# Altium PCB PFCv04.03.PcbDoc
Units mm, origin at the board's own origin, x right, y up, seen from the top; angles counter-clockwise.
Board outline 76.71 x 30.99 mm, 4 copper layers (Top Layer, Internal Plane 1, Internal Plane 2, Bottom Layer); 95 components, 75 nets, 406 pads, 194 vias.
Unrouted connection lines stored in the file: 10.
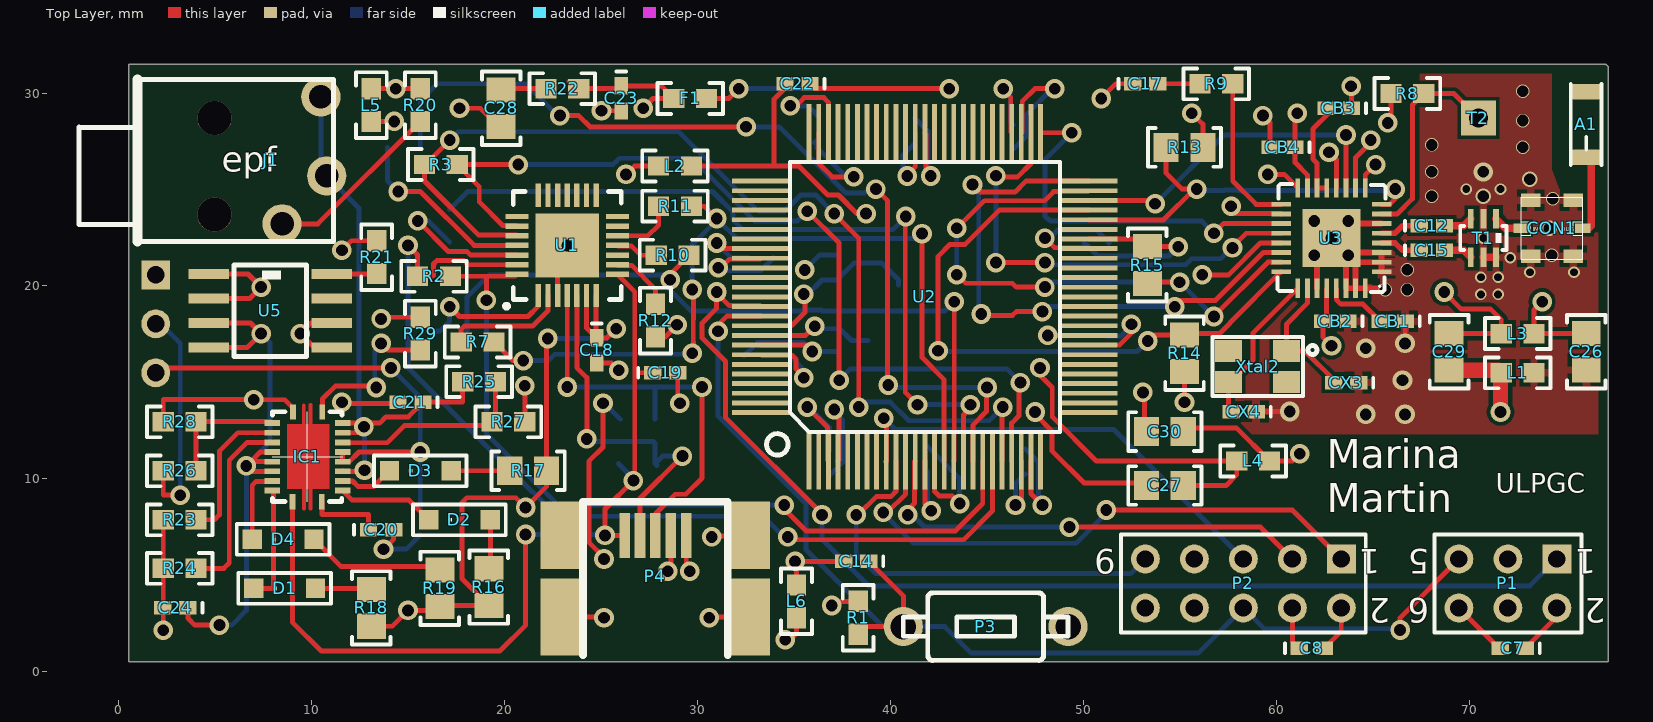
[diagram p0: Top Layer view]
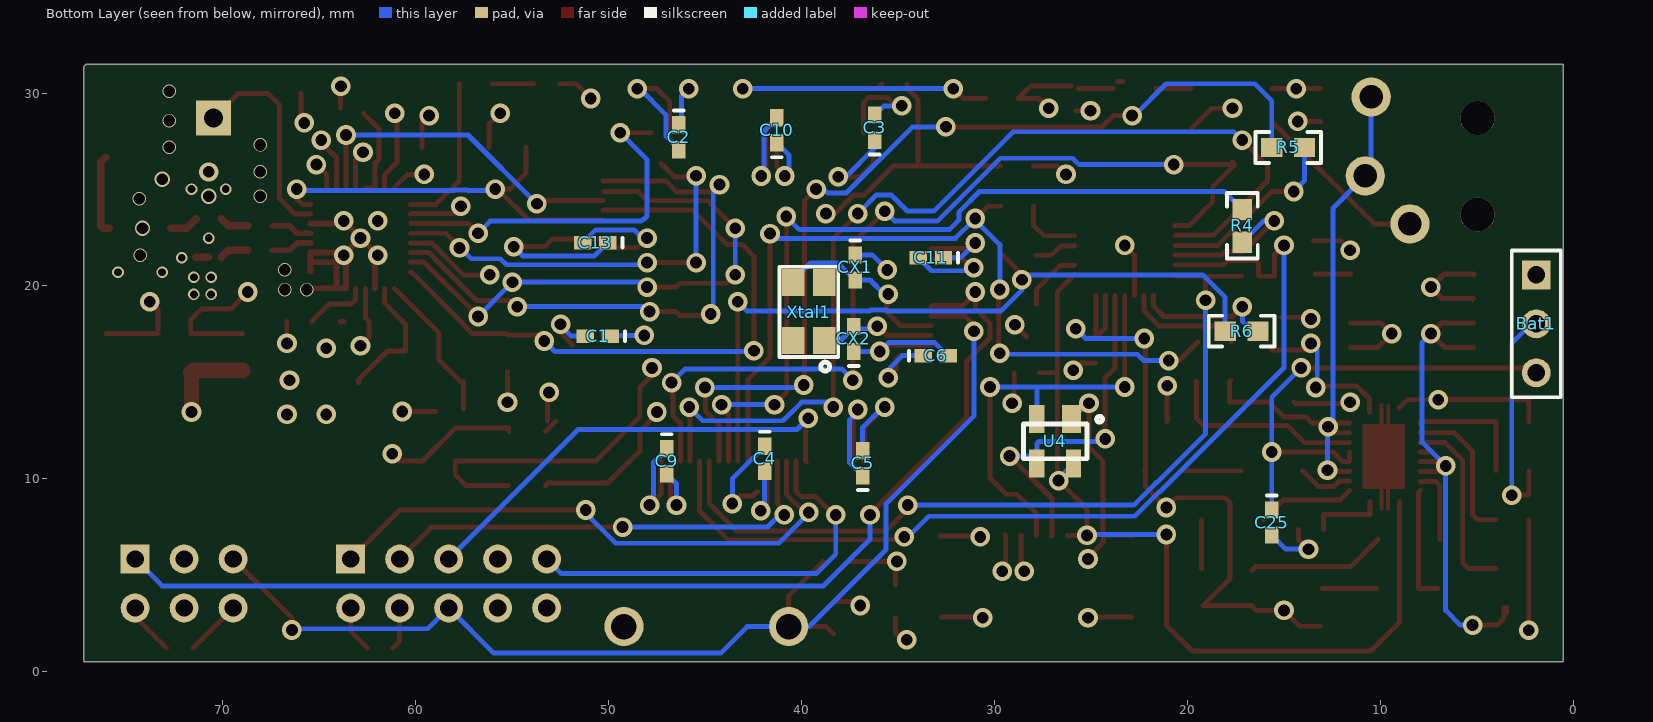
[diagram p1: Bottom Layer view, seen from below]
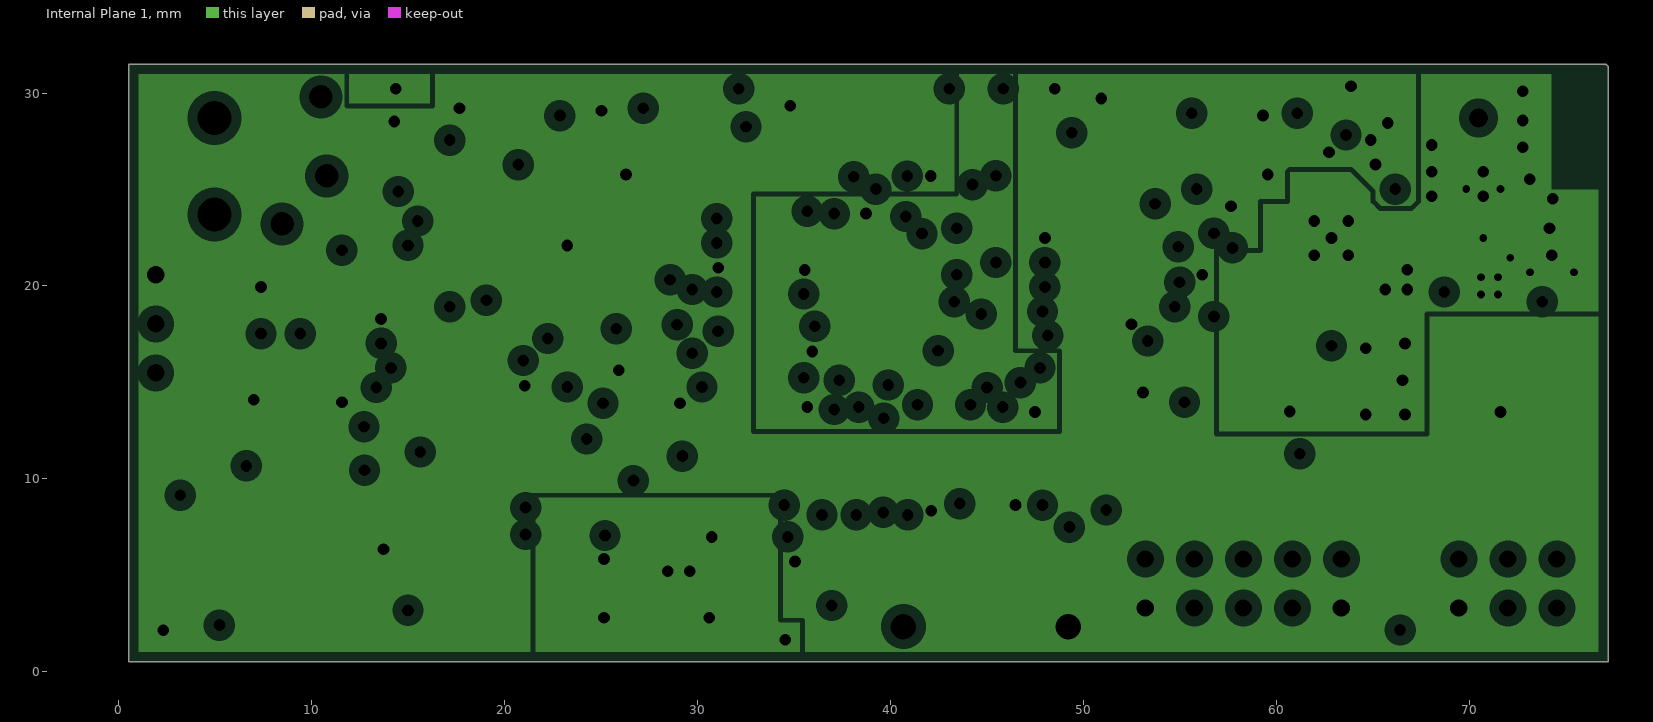
[diagram p2: Internal Plane 1, clearances drawn from the general rule]
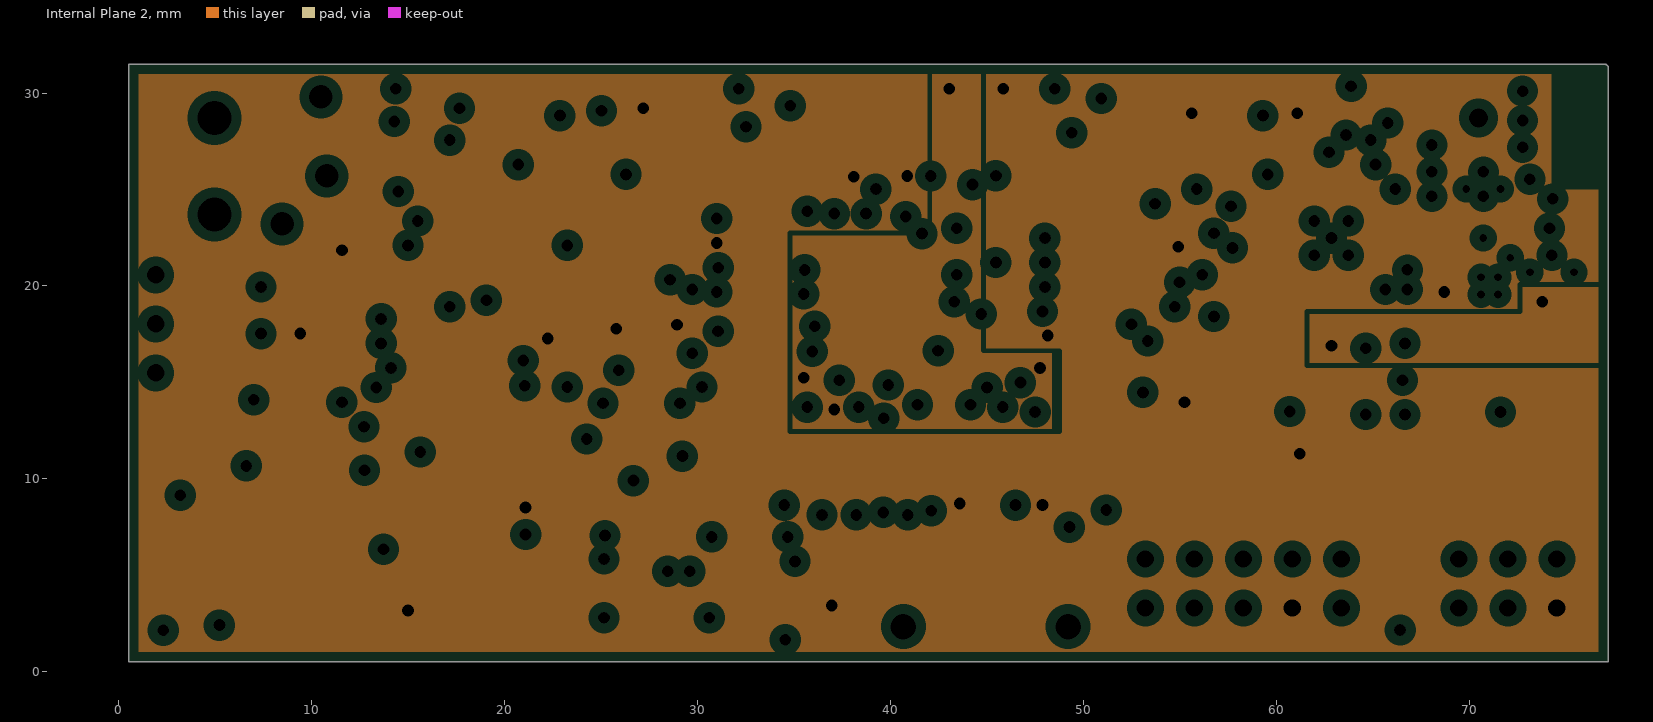
[diagram p3: Internal Plane 2, clearances drawn from the general rule]

## Layer stack, top to bottom
Top Layer: signal copper 0.0356
Dielectric: core 0.32, FR-4, Dk 4.8
Internal Plane 1: plane copper 0.0356, net (Multiple Nets)
Dielectric: prepreg 0.32, FR-4, Dk 4.8
Internal Plane 2: plane copper 0.0356, net (Multiple Nets)
Dielectric: core 0.32, FR-4, Dk 4.8
Bottom Layer: signal copper 0.0356

## Board outline
0.508,0.508 0.508,31.496 77.089,31.496 77.216,31.369 77.216,0.508 0.508,0.508

## Design rules (kind name [scope] priority, off if disabled: settings)
Clearance [All] p1: gap=0.2
ComponentClearance [All] p1: gap=0.15 collisioncheckmode=3 verticalgap=0.2 showdistances=TRUE
FabricationTestPointUsage TestPointUsage [All] p1: valid=0 allowmultiple=FALSE
FabricationTestpoint Testpoint [All] p1: side=3 testpointundercomponent=TRUE minsize=1.016 maxsize=2.54 preferedsize=1.524 minholesize=0 maxholesize=1.016 preferedholesize=0.813 testpointgrid=0.025 allowsidetop=TRUE allowsidebottom=TRUE usegrid=TRUE gridtolerance=0
MinimumSolderMaskSliver [All] p1 off: minsoldermaskwidth=0.1
PlaneClearance [All] p1: clearance=0.508
PlaneConnect [All] p1: planeconnectstyle=Direct reliefexpansion=0.508 reliefentries=4 reliefconductorwidth=0.254 reliefairgap=0.254
PolygonConnect PolygonConnect_2 [(IsVia AND InNet('RF-GND'))] p1: connectstyle=Direct reliefconductorwidth=0.254 reliefentries=4 polygonreliefangle="90 Angle"
PolygonConnect PolygonConnect_1 [All vs IsNamedPolygon('RFGND')] p2: connectstyle=Relief reliefconductorwidth=0.4 reliefentries=4 polygonreliefangle="90 Angle"
PolygonConnect [All] p3: connectstyle=Relief reliefconductorwidth=0.3 reliefentries=4 polygonreliefangle="90 Angle"
RoutingVias [All] p1: holewidth=0.4 width=0.9 viastyle="Through Hole" minholewidth=0.3 minwidth=0.3 maxholewidth=10 maxwidth=10
SilkToSilkClearance [All] p1 off: silktosilkclearance=0.2
SilkscreenOverComponentPads [All] p1 off: minsilkscreentomaskgap=0
SolderMaskExpansion [All] p1: expansion=0.102
Width [All] p1: maxlimit=10 minlimit=0.2 preferedwidth=0.2
20 further rules are at their usual default settings.

## Components (designator, comment, footprint, x,y, rotation, side; value= is the part's Value field where it differs from the comment)
A1 "Ant. 2.45G" "ANTENNA CHIP" 76.073,26.67 r90 top
Bat1 "Batttery" HDR1X3 1.905,20.574 r270 bottom
C1 "C" 0402 50.561,17.399 r0 bottom
C2 "C" 0402 46.355,27.701 r270 bottom
C3 "C" 0402 36.195,28.209 r90 bottom
C4 "C" 0402 41.91,11.034 r270 bottom
C5 "C" 0402 36.83,10.81 r90 bottom
C6 "C" 0402 33.035,16.383 r180 bottom
C7 "C" 0402 72.263,1.219 r180 top
C8 "C" 0402 61.849,1.219 r0 top
C9 "C" 0402 46.99,10.907 r270 bottom
C10 "C" 0402 41.275,28.067 r90 bottom
C11 "C" 0402 33.289,21.463 r0 bottom
C12 "22pF_0402" 0402 68.072,23.114 r0 top
C13 "C" 0402 50.688,22.225 r0 bottom
C14 "C" 0402 38.227,5.715 r180 top
C15 "22pF_0402" 0402 68.072,21.844 r0 top (schematic designator C12)
C17 "C" 0402 53.213,30.48 r0 top
C18 "C" 0402 24.765,16.652 r270 top
C19 "C" 0402 28.321,15.494 r0 top
C20 "C" 0402 13.589,7.366 r0 top
C21 "C" 0402 15.113,13.97 r180 top
C22 "C" 0402 35.179,30.48 r180 top
C23 "C" 0402 26.035,29.718 r270 top
C24 "C" 0402 2.921,3.302 r180 top
C25 "C" 0402 15.621,7.732 r270 bottom
C26 "100nF_0805" 0805 76.073,16.586 r90 top
C27 "100nF_0805" 0805 54.229,9.652 r0 top
C28 "10uF" 0805 19.812,29.21 r90 top
C29 "100nF_0805" 0805 68.961,16.586 r90 top
C30 "100nF_0805" 0805 54.229,12.446 r0 top
CB1 "C" 0402 66.04,18.161 r180 top
CB2 "C" 0402 63.068,18.161 r180 top
CB3 "C" 0402 63.246,29.21 r180 top
CB4 "C" 0402 60.325,27.178 r180 top
CON1 "Conector Antena" "MM8430-2600_COAXIAL CONNECTORS" 74.295,22.987 r0 top
CX1 "C" 0402 37.211,20.955 r270 bottom
CX2 "C" 0402 37.287,17.247 r90 bottom
CX3 "C" 0402 63.627,14.986 r180 top
CX4 "C" 0402 58.318,13.487 r180 top
D1 "Diodo Led" "DIODE LED" 8.585,4.318 r180 top
D2 "Diodo Led" "DIODE LED" 17.653,7.874 r180 top
D3 "Diodo Led" "DIODE LED" 15.621,10.414 r180 top
D4 "Diodo Led" "DIODE LED" 8.509,6.858 r180 top
F1 "Ferrita" 0603 29.616,29.718 r0 top
IC1 "BQ24031" BQ24031 9.587,8.442 r90 top
J1 "CAMSHOT" MJ-2509N 0.965,25.705 r270 top
L1 "22nH_0603" 0603 72.517,15.494 r180 top
L2 "22nH_0603" 0603 28.829,26.213 r180 top
L3 "22nH_0603" 0603 72.517,17.526 r0 top
L4 "22nH_0603" 0603 58.801,10.922 r180 top
L5 "22nH_0603" 0603 13.081,29.376 r270 top
L6 "22nH_0603" 0603 35.128,3.644 r90 top
P1 "Programador" HDR2X3 74.549,5.842 r180 top
P2 "Programador" HDR2X5 63.373,5.842 r180 top
P3 "Pulsador" PUSH-BUTTON-W 40.665,2.337 r0 top
P4 "USB-AB" USB-MINI-AB-SMT 27.813,7.061 r90 top
R1 "R 0402" 0603 38.329,2.794 r90 top
R2 "R 0402" 0603 16.332,20.498 r180 top
R3 "R 0402" 0603 16.688,26.289 r180 top
R4 "R 0402" 0603 17.145,23.114 r90 bottom
R5 "R 0402" 0603 14.771,27.178 r0 bottom
R6 "R 0402" 0603 17.184,17.653 r0 bottom
R7 "R 0402" 0603 18.593,17.094 r0 top
R8 "R 0402" 0603 66.802,29.972 r180 top
R9 "R 0402" 0603 56.896,30.48 r180 top
R10 "R 0402" 0603 28.702,21.59 r180 top
R11 "R 0402" 0603 28.829,24.13 r180 top
R12 "R 0402" 0603 27.813,18.2 r90 top
R13 "16.9kohm-0805" 0805 55.245,27.178 r0 top
R14 "16.9kohm-0805" 0805 55.245,16.51 r270 top
R15 "16.9kohm-0805" 0805 53.315,21.082 r90 top
R16 "16.9kohm-0805" 0805 19.177,4.384 r270 top
R17 "16.9kohm-0805" 0805 21.209,10.414 r0 top
R18 "16.9kohm-0805" 0805 13.081,3.302 r270 top
R19 "16.9kohm-0805" 0805 16.637,4.318 r270 top
R20 "R 0402" 0603 15.621,29.376 r90 top
R21 "R 0402" 0603 13.36,21.488 r90 top
R22 "R 0402" 0603 22.987,30.226 r0 top
R23 "R 0402" 0603 3.144,7.874 r180 top
R24 "R 0402" 0603 3.144,5.357 r180 top
R25 "R 0402" 0603 18.669,15.037 r180 top
R26 "R 0402" 0603 3.144,10.414 r0 top
R27 "R 0402" 0603 20.193,12.954 r180 top
R28 "R 0402" 0603 3.144,12.954 r0 top
R29 "R 0402" 0603 15.621,17.526 r270 top
T1 "BALUN" BALUN 70.739,22.479 r270 top
T2 "TESTPOINT" TESTPOINT 70.485,28.702 r0 top
U1 "USB" QFN28_5X5 23.241,22.098 r90 top
U2 "XMEGA" QUAD100 41.783,19.431 r90 top
U3 "RF TRAN" QFN32_50 62.865,22.479 r90 top
U4 "TVS" SOT-143 26.848,11.938 r0 bottom
U5 "TPS77633D" TPS77633D 5.969,21.082 r270 top
Xtal1 "Xtal TSX-4025" TSX-4025 39.624,18.669 r90 bottom
Xtal2 "Xtal TSX-4025" TSX-4025 59.03,15.824 r180 top

## Footprints (in the part's own frame and the unit in brackets; to place one, negate y for a bottom-side part, rotate by r counter-clockwise, add the part's x,y. Pads: shape width x height; smd on the part's side, far side on the other; paste and mask are expansions set on the pad)
0402 [mm] "Chip Capacitor; Body 1.0 x 0.5 mm (LxW typ)"
  rect 0.9x0.7 smd: 1(-0.65,0) 2(0.65,0)
  silkscreen extent -1.4,-0.25 -1.4,0.25
0603 [mm]
  rect 1.1x1 smd: 1(-0.85,0) 2(0.85,0)
  silkscreen extent -1.7,-0.8 1.7,0.8
0805 [mm] "Chip Resistor; Body 2.0 x 1.3 mm (LxW typ)"
  rect 1.3x1.5 smd: 1(-0.95,0) 2(0.95,0)
  silkscreen extent -1.9,-1 1.9,1
"ANTENNA CHIP" [mm] "ANTENNA CHIP 2.4GHZ"
  rect 0.8x1.6 smd: 1(0,0) 2(3.4,0)
  silkscreen extent -0.4,-0.8 3.8,0.8
BALUN [mm] "FILTER BALUN CER CHIP 2.4GHZ"
  rect 1x0.3 smd: 1(-1,0.65) 2(-1,0) 3(-1,-0.65) 4(1,-0.65) 5(1,0) 6(1,0.65)
  silkscreen extent -0.62,-1.2 0.62,1.2
BQ24031 [mm]
  rect 0.8x0.3 smd: 1(0.37,-0.93) 10(5.02,-0.955) 11(5.02,0.57) 20(0.37,0.595)
  rect 0.3x0.8 smd: 2(0.945,-2.005) 3(1.445,-2.005) 4(1.945,-2.005) 5(2.445,-2.005) 6(2.945,-2.005) 7(3.445,-2.005) 8(3.945,-2.005) 9(4.445,-2.005) 12(4.445,1.645) 13(3.945,1.645) 14(3.445,1.645) 15(2.945,1.645) 16(2.445,1.645) 17(1.945,1.645) 18(1.445,1.645) 19(0.945,1.645)
  Top Layer region: 1.015,-1.315 4.39,-1.315 4.39,0.865 1.015,0.865
  Top Layer lines w0.2: 5.355,0.005 0,0 ; 0,-0.35 5.375,-0.35
  silkscreen extent 0.37,-2 5.03,1.65
"DIODE LED" [mm]
  rect 1x1 smd: 1(-1.6,0) 2(1.6,0)
  silkscreen extent -2.4,-0.8 2.4,0.8
HDR1X3 [mm] "Connector; Header; 3 Position"
  rect 1.5x1.5 hole 0.9: 1(0,0)
  round 1.5 hole 0.9: 2(2.54,0) 3(5.08,0)
  silkscreen extent -1.27,-1.27 6.35,1.27
HDR2X3 [mm] "Connector; Header; 3x2 Position"
  rect 1.5x1.5 hole 0.9: 1(0,0)
  round 1.5 hole 0.9: 2(0,2.54) 3(2.54,0) 4(2.54,2.54) 5(5.08,0) 6(5.08,2.54)
  silkscreen extent -1.27,-1.27 6.35,3.81
HDR2X5 [mm] "Connector; Header; 5x2 Position"
  rect 1.5x1.5 hole 0.9: 1(0,0)
  round 1.5 hole 0.9: 2(0,2.54) 3(2.54,0) 4(2.54,2.54) 5(5.08,0) 6(5.08,2.54) 7(7.62,0) 8(7.62,2.54) 9(10.16,0) 10(10.16,2.54)
  silkscreen extent -1.27,-1.27 11.43,3.81
MJ-2509N [mil] "CONN MONO JACK 2.5MM PCB MNT"
  round 80 hole 48: 1(98,295) 2(0,386) 3(-161,374)
  round 70 hole 70: NC(-118,157) NC(79,157)
  silkscreen extent -197,-120 134,400
"MM8430-2600_COAXIAL CONNECTORS" [mm]
  rect 0.8x0.5 smd: 1(-1.6,0) 2(1.6,0)
  rect 1x0.7 smd: 3(-1.1,1.45) 4(1.1,1.45) 5(-1.102,-1.45) 6(1.1,-1.45)
  silkscreen extent -1.6,-1.6 1.6,1.6
PUSH-BUTTON-W [mil] "SWITCH TACT 6X3.5MM H=4.3MM"
  round 80 hole 52: 1(0,0) 2(336.22,0)
  silkscreen extent 0,-69 336,69
QFN28_5X5 [mm] "QFN para SiLab CP2102"
  rect 3.3x3.3 smd: 0(0,0)
  rect 1.2x0.28 smd: 1(-2.6,1.5) 2(-2.6,1) 3(-2.6,0.5) 4(-2.6,0) 5(-2.6,-0.5) 6(-2.6,-1) 7(-2.6,-1.5) 15(2.6,-1.5) 16(2.6,-1) 17(2.6,-0.5) 18(2.6,0) 19(2.6,0.5) 20(2.6,1) 21(2.6,1.5)
  rect 0.28x1.2 smd: 8(-1.5,-2.6) 9(-1,-2.6) 10(-0.5,-2.6) 11(0,-2.6) 12(0.5,-2.6) 13(1,-2.6) 14(1.5,-2.6) 22(1.5,2.6) 23(1,2.6) 24(0.5,2.6) 25(0,2.6) 26(-0.5,2.6) 27(-1,2.6) 28(-1.5,2.6)
  silkscreen extent -3.25,-2.8 2.8,3.25
QFN32_50 [mm] "QFN32"
  rect 0.25x1 smd: 1(-1.75,-2.6) 2(-1.25,-2.6) 3(-0.75,-2.6) 4(-0.25,-2.6) 5(0.25,-2.6) 6(0.75,-2.6) 7(1.25,-2.6) 8(1.75,-2.6) 17(1.75,2.6) 18(1.25,2.6) 19(0.75,2.6) 20(0.25,2.6) 21(-0.25,2.6) 22(-0.75,2.6) 23(-1.25,2.6) 24(-1.75,2.6)
  rect 1x0.25 smd: 9(2.6,-1.75) 10(2.6,-1.25) 11(2.6,-0.75) 12(2.6,-0.25) 13(2.6,0.25) 14(2.6,0.75) 15(2.6,1.25) 16(2.6,1.75) 25(-2.6,1.75) 26(-2.6,1.25) 27(-2.6,0.75) 28(-2.6,0.25) 29(-2.6,-0.25) 30(-2.6,-0.75) 31(-2.6,-1.25) 32(-2.6,-1.75)
  rect 3x3 smd: 33(0,0)
  silkscreen extent -2.8,-2.8 2.8,2.8
QUAD100 [mm]
  rect 3x0.25 smd: 1(-8.5,6) 2(-8.5,5.5) 3(-8.5,5) 4(-8.5,4.5) 5(-8.5,4) 6(-8.5,3.5) 7(-8.5,3) 8(-8.5,2.5) 9(-8.5,2) 10(-8.5,1.5) 11(-8.5,1) 12(-8.5,0.5) 13(-8.5,0) 14(-8.5,-0.5) 15(-8.5,-1) 16(-8.5,-1.5) 17(-8.5,-2) 18(-8.5,-2.5) 19(-8.5,-3) 20(-8.5,-3.5) 21(-8.5,-4) 22(-8.5,-4.5) 23(-8.5,-5) 24(-8.5,-5.5) 25(-8.5,-6) 51(8.5,-6) 52(8.5,-5.5) 53(8.5,-5) 54(8.5,-4.5) 55(8.5,-4) 56(8.5,-3.5) 57(8.5,-3) 58(8.5,-2.5) 59(8.5,-2) 60(8.5,-1.5) 61(8.5,-1) 62(8.5,-0.5) 63(8.5,0) 64(8.5,0.5) 65(8.5,1) 66(8.5,1.5) 67(8.5,2) 68(8.5,2.5) 69(8.5,3) 70(8.5,3.5) 71(8.5,4) 72(8.5,4.5) 73(8.5,5) 74(8.5,5.5) 75(8.5,6)
  rect 0.25x3 smd: 26(-6,-8.5) 27(-5.5,-8.5) 28(-5,-8.5) 29(-4.5,-8.5) 30(-4,-8.5) 31(-3.5,-8.5) 32(-3,-8.5) 33(-2.5,-8.5) 34(-2,-8.5) 35(-1.5,-8.5) 36(-1,-8.5) 37(-0.5,-8.5) 38(0,-8.5) 39(0.5,-8.5) 40(1,-8.5) 41(1.5,-8.5) 42(2,-8.5) 43(2.5,-8.5) 44(3,-8.5) 45(3.5,-8.5) 46(4,-8.5) 47(4.5,-8.5) 48(5,-8.5) 49(5.5,-8.5) 50(6,-8.5) 76(6,8.5) 77(5.5,8.5) 78(5,8.5) 79(4.5,8.5) 80(4,8.5) 81(3.5,8.5) 82(3,8.5) 83(2.5,8.5) 84(2,8.5) 85(1.5,8.5) 86(1,8.5) 87(0.5,8.5) 88(0,8.5) 89(-0.5,8.5) 90(-1,8.5) 91(-1.5,8.5) 92(-2,8.5) 93(-2.5,8.5) 94(-3,8.5) 95(-3.5,8.5) 96(-4,8.5) 97(-4.5,8.5) 98(-5,8.5) 99(-5.5,8.5) 100(-6,8.5)
  silkscreen extent -8.21,-7 7,8.21
SOT-143 [mm] "SOT143"
  rect 1x1.45 smd: 1(-0.85,-1.15)
  rect 0.8x1.45 smd: 2(0.95,-1.15) 3(0.95,1.15) 4(-0.95,1.15)
  silkscreen extent -2.45,-1.3 1.65,0.9
TESTPOINT [mm] "Punto de test"
  rect 1.8x1.8 hole 1: 1(0,0)
TPS77633D [mm]
  rect 0.51x2.116 smd: 1(0.467,-1.312) 2(1.737,-1.312) 3(3.007,-1.312) 4(4.277,-1.312) 5(4.277,5.058) 6(3.007,5.058) 7(1.737,5.058) 8(0.467,5.058)
  silkscreen extent 0,0 4.75,3.75
TSX-4025 [mm] "Xtal 16Mhz"
  rect 1.4x1.15 smd: 1(-1.5,-0.8) 2(1.5,-0.8) 3(1.5,0.8) 4(-1.5,0.8)
  silkscreen extent -3.09,-1.52 2.33,1.53
USB-MINI-AB-SMT [mm] "Conector MINI-USB-AB-SMT"
  rect 2.35x0.55 smd: D+(0,0) D-(0,0.8) ID(0,-0.8) UGND(0,-1.6) VBUS(0,1.6)
  rect 4x2.05 smd: shield(-4.225,-4.925) shield(-4.225,4.925)
  rect 3.5x2.05 smd: shield(0,4.925) shield(0,-4.925)
  silkscreen extent -6.2,-3.75 1.75,3.75

## Part data
A1: library part 2450AT18A100, "ANTENNA CHIP 2.4GHZ"
Bat1: library part "Header 3", "Header, 3-Pin"
C1 C2 C3 C4 C5 C6 C7 C8 C9 C10 C11 C13 C14 C17 C18 C19 C20 C21 C22 C23 C24 C25 CB1 CB2 CB3 CB4 CX1 CX2 CX3 CX4: "CONDENSADOR"
C12 C15: library part 56pF_0402, "CAP CER 56PF 50V 5% C0G 0402"
C26 C27 C29 C30: "CAP CER 100PF 630V X7R 0805"
C28: library part 10uF_0805, "CAP CER 10UF 10V Y5V 0805"
CON1: library part "CON ANT-MM8430-2600RA1", "CONN MW COAXIAL WITH SWITCH"
D1 D2 D3 D4: library part LTST-C230CKT, "Typical INFRARED GaAs LED"
F1: library part BLM21AH102SN1, "Chip Ferrite Beads"
IC1: "IC PWR MANAGEMENT SYSTEM 20-QFN"
J1: library part MJ-2509N_1, "CONN MONO JACK 2.5MM PCB MNT"
L1 L2 L3 L4 L5 L6: "CER INDUCTOR 22NH 0603"
P1: library part "Header 3X2", "Header, 3-Pin, Dual row"
P2: library part "Header 5X2", "Header, 5-Pin, Dual row"
P3: library part PUSHBUTTON, "SWITCH TACT 6X3.5MM H=4.3MM 180G"
P4: library part WM1722, "CONN RECEPT USB 5POS RT ANG SMD"
R1 R2 R3 R4 R5 R6 R7 R8 R9 R10 R11 R12 R20 R21 R22 R23 R24 R25 R26 R27 R28 R29: "RESISTENCIA 0402 SMD"
R13 R14 R15 R16 R17 R18 R19: "RES 16.9K OHM 1/8W 1% 0805 SMD"
T1: library part 2450FB39B100E, "FILTER BALUN CER CHIP 2.4GHZ"
T2: "Punto de Test"
U1: library part CP2102, "IC USB-TO-UART BRIDGE 28MLP"
U2: library part ATXMEGA64A1, "MCU AVR 64K FLASH 1.6V 100-TQFP"
U3: library part AT86RF231, "IC TXRX ZIGBEE/802.15.4 32QFN"
U4: library part SP0503BAHTG, "TVS AVAL DIODE ARRAY 3 CH SOT143"
U5: "IC 3.3V 500MA LDO REG 8-SOIC"
Xtal1 Xtal2: "Cristal 16Mhz"

## Via types
v1: diameter 1.016, hole 0.61, Top Layer to Bottom Layer, 168 vias
v2: diameter 0.7, hole 0.6, Top Layer to Bottom Layer, 11 vias
v3: diameter 0.6, hole 0.4, Top Layer to Bottom Layer, 10 vias
v4: diameter 0.8, hole 0.6, Top Layer to Bottom Layer, 3 vias
v5: diameter 1.016, hole 0.61, Top Layer to Bottom Layer, tented bottom, 1 vias
v6: diameter 1, hole 0.6, Top Layer to Bottom Layer, 1 vias

## Nets (pads, with @x,y where several pads share a name; then routed paths per layer and width w, separated by ;. In a path a pad name is that pad's centre, name@x,y a point inside that pad or via, vN(x,y) a via of type N, cw(c..) or ccw(c..) an arc to the next point about the centre after c; other vN are vias at no path point)
A-GND: C5.2 C6.2 C22.2 C27.1 CX1.1 CX2.1 L2.1 U2.3 U2.93 | length 39.1
  Top Layer w0.254: L2.1 35.255,26.213 36.757,24.711 37.303,24.711 38.265,23.749 v1(38.735,23.749) ; U2.93 35.647,16.931 v1@35.962,16.616 ; 33.963,26.267 33.963,29.683 34.529,30.249 C22.2 ; v1(35.687,13.716) 36.735,12.668 36.735,10.979 U2.3 ; v1(47.498,13.462) 47.498,13.335 48.383,12.45 48.383,11.434 50.038,9.779 53.152,9.779 C27.1
  Bottom Layer w0.254: C6.2 C6.2@32.512,16.51 ; C6.2@32.423,16.383 33.1,17.06 35.48,17.06 v1(35.944,16.597) CX2.1 ; v1(35.56,20.828) 36.337,21.605 CX1.1 ; v1(35.687,13.716) 35.776,13.716 36.83,12.662 C5.2 C5.2@36.83,11.684
A-VCC: C5.1 C6.1 C22.1 C27.2 F1.2 L4.2 U2.4 U2.94 | length 48.4
  Top Layer w0.254: F1.2 31.623,29.718 v1(32.131,30.226) ; U2.94@33.331,16.383 34.918,16.383 35.11,16.192 35.11,15.69 v1@35.56,15.24 ; C22.1 36.083,30.226 v1(43.053,30.226) ; U2.4 37.331,10.979 v1@37.331,13.208 ; v1(47.752,15.748) 47.752,15.367 48.387,14.732 48.387,13.208 50.673,10.922 L4.2 57.951,10.199 57.404,9.652 C27.2
  Bottom Layer w0.254: v1(32.131,30.226) v1(43.053,30.226) ; C6.1 34.777,16.383 35.56,15.6 v1@35.56,15.24 ; C5.1 37.507,10.837 37.507,13.039 v1@37.338,13.208
  other v1: 37.084,13.589 35.509,15.24
D+: P4.D+ U1.4 U4.2 | length 22
  Top Layer w0.254: v1(23.241,14.757) U1.4 ; P4.D+ 27.813,8.174 28.837,9.198 29.391,9.198 30.226,10.033 v1@30.226,14.351
  Bottom Layer w0.254: v1(23.241,14.757) 27.798,14.757 ; U4.2 27.798,14.757 ; v1(30.226,14.757) 27.798,14.757
D-: P4.D- U1.5 U4.3 | length 18.9
  Top Layer w0.254: U1.5 23.741,15.756 24.257,15.24 v1(24.257,12.065) ; P4.D-@27.051,7.023 P4.D- 27.013,8.979 v1(29.21,11.176)
  Bottom Layer w0.254: v1@24.384,11.938 27.686,11.938 27.798,11.826 U4.3 ; U4.3@27.897,10.689 U4.3 ; v1(29.21,11.176) 28.186,11.176 U4.3
DC-GND: L5.1 R20.2 | length 2.5
  Top Layer w0.254: L5.1 R20.2
  other v1: 14.351,30.226
GND: Bat1.1 C1.2 C2.2 C3.2 C4.2 C7.2 C8.2 C9.2 C10.2 C11.2 C13.2 C14.2 C17.1 C18.2 C19.2 C20.2 C21.2 C23.2 C24.2 C25.2 C28.1 C29.1 C30.1 CB3.1 CB4.2 IC1.11 L1.2 L2.2 L5.2 L6.2 P1.6 P2.2 P2.10 P3.2 R8.2 R23.2 R24.2 R27.1 R28.1 R29.1 U1.0 U1.3 U2.13 U2.23 U2.33 U2.43 U2.53 U2.63 U2.73 U2.84 U3.9 U3.10 U3.12 U3.16 U3.18 U3.21 U5.1 U5.2 | length 121.6
  Top Layer w0.254: v1(2.294,2.151) R24.2 R23.2 ; R28.1 2.294,14.105 v1@6.977,14.105 ; U5.1@5.124,20.574 5.165,20.615 6.69,20.615 v1(7.366,19.939) 6.772,19.345 5.165,19.345 U5.2@5.205,19.304 ; v1(6.985,14.097) 8.598,14.097 IC1.11@9.017,13.678 ; v1(11.557,13.97) 11.63,13.897 14.39,13.897 C21.2 ; L5.2 v1(14.273,28.526) ; v1(13.589,18.288) 13.677,18.376 15.113,18.376 ; v1(13.716,6.35) 14.239,6.873 C20.2 ; v1(17.653,29.21) 18.735,29.21 C28.1@19.748,28.197 ; R27.1 v1(21.043,14.82) ; U1.3 22.741,21.598 v1(23.241,22.098) ; C18.2 25.527,16.002 v1(25.908,15.621) ; v1(25.019,29.083) 25.766,29.083 C23.2@25.781,29.068 ; v1(26.289,25.781) 26.721,26.213 L2.2 ; C19.2 28.971,14.082 v1@29.083,13.97 ; v1(31.075,20.937) 31.132,20.88 31.144,20.88 31.648,21.383 33.235,21.383 U2.84 ; v1(34.798,29.337) 35.102,29.337 35.523,29.758 36.544,29.758 36.783,29.518 U2.73 ; v1(35.052,5.715) C14.2 ; L6.2 v1@35.128,5.639 ; U2.13 41.783,8.687 42.11,8.36 v1(42.11,8.336) ; U2.63 41.831,27.883 41.831,25.953 v1(42.088,25.696) ; v1(46.482,8.636) 46.783,8.937 U2.23 ; U2.53 46.831,27.979 46.831,29.566 47.491,30.226 v1(48.514,30.226) ; v1(48.006,22.479) 48.508,21.977 U2.43@50.237,21.977 ; v1(50.927,29.718) 51.689,30.48 C17.1 ; 51.87,16.931 52.491,17.552 v1(52.491,18.016) ; C30.1@52.746,12.979 C30.1 ; v1(53.086,14.478) v1@53.279,14.285 ; C30.1@53.169,12.998 v1@53.169,14.395 ; v1@56.261,20.574 57.531,20.574 59.186,22.229 U3.21 ; v1(57.658,24.13) 57.658,24.003 57.912,23.749 60.245,23.749 U3.18 ; v1(59.309,28.829) 59.675,28.463 CB4.2 ; v1(59.563,25.781) 60.413,25.781 U3.16 ; C8.2 63.373,2.093 P2.2 ; v1(62.738,26.924) 63.115,26.547 U3.12 ; v1(63.881,30.353) 63.896,30.338 CB3.1 ; U3.10 64.115,26.65 ; 64.15,26.685 v1@65.024,27.559 ; U3.9 64.615,25.753 v1(65.151,26.289) ; v1@65.952,28.448 R8.2 ; P1.6 C7.2@71.552,1.219
  Top Layer w0.8: C29.1 71.525,15.636 L1.2 71.628,15.455 v1(71.628,13.462)
  Bottom Layer w0.254: v1(13.716,6.35) 14.889,6.35 C25.2 ; v1(31.075,20.937) 31.075,20.847 31.136,20.786 33.262,20.786 C11.2 ; v1(34.798,29.337) 35.717,29.337 C3.2 C3.2@36.195,28.821 ; C10.2 41.275,28.679 41.952,28.002 v1@41.952,25.832 ; C4.2 41.91,8.56 42.11,8.36 v1(42.11,8.336) ; C2.2@46.355,27.089 47.032,27.766 47.032,28.871 v1@48.45,30.29 ; v1(46.482,8.636) 46.482,9.749 C9.2 ; v1(48.006,22.479) 48.26,22.479 48.683,22.902 50.661,22.902 C13.2 ; C1.2 51.943,17.399 v1@52.491,17.947
  other v1: 29.083,13.919 56.159,20.574 64.897,27.559 65.786,28.448
IRQ: R14.1 U2.47 U3.24 | length 32.9
  Top Layer w0.254: v1@42.472,16.637 42.472,21.536 43.088,22.152 43.869,22.152 45.648,23.931 U2.47 ; v1(53.34,17.145) 53.655,17.46 R14.1 55.316,17.531 57.065,17.531 57.604,18.069 57.604,18.089 60.244,20.729 U3.24
  Bottom Layer w0.254: v1@42.84,16.596 52.791,16.596 v1(53.34,17.145)
  other v1: 42.469,16.637
ISET2: IC1.7 R25.1 R27.2 | length 10.4
  Top Layer w0.254: IC1.7 11.614,11.865 13.904,11.865 14.793,12.754 19.143,12.754 19.519,13.13 R25.1
NetA1_1: A1.1 CON1.2 | length 4.1
  Top Layer w0.394: CON1.2 76.2,22.987 76.327,23.114 76.327,26.416 A1.1
NetBat1_2: Bat1.2 R26.1 | length 11.6
  Top Layer w0.254: R26.1@2.286,10.414 R26.1 2.294,9.152 v1@3.167,9.152
  Bottom Layer w0.254: Bat1.2 2.159,18.034 3.175,17.018 v1@3.175,9.271
  other v1: 3.175,9.144
NetBat1_3: Bat1.3 C25.1 IC1.5 IC1.6 | length 25.2
  Top Layer w0.254: Bat1.3 2.159,15.748 v1(14.097,15.748) ; IC1.6 IC1.5 11.946,10.887 12.446,11.387 v1(15.621,11.387)
  Bottom Layer w0.254: Bat1.3@1.778,15.494 Bat1.3 ; v1(14.097,15.748) 15.621,14.224 v1(15.621,11.387) C25.1
NetC12_1: C12.1 U3.5 | length 2.1
  Top Layer w0.3: U3.5 66.163,22.729 66.548,23.114 C12.1
NetC12_2: C12.2 T1.3 | length 1.5
  Top Layer w0.39: C12.2 69.724,23.114 T1.3
NetC15_1: C15.1 U3.4 | length 2.1
  Top Layer w0.3: U3.4 66.163,22.229 66.548,21.844 C15.1
NetC15_2: C15.2 T1.4 | length 1.5
  Top Layer w0.394: C15.2 69.724,21.844 T1.4
NetC17_2: C17.2 R9.2 | length 2.2
  Top Layer w0.254: C17.2 R9.2
NetC20_1: C20.1 IC1.1 | length 3.9
  Top Layer w0.254: IC1.1 10.517,8.152 12.93,8.152 12.939,8.143 C20.1
NetC24_1: C24.1 IC1.15 IC1.16 IC1.17 U5.3 U5.4 | length 28.7
  Top Layer w0.254: C24.1@3.44,3.051 3.451,3.307 C24.1@3.452,3.325 ; C24.1 3.571,2.779 3.937,2.413 v1(5.207,2.413) ; U5.4@5.165,16.805 6.645,16.805 v1(7.366,17.526) 6.817,18.075 U5.3@5.165,18.075 ; IC1.17 6.885,10.387 v1(6.604,10.668) v1@6.823,10.887 ; IC1.16 v1@6.823,10.887 ; IC1.15 7.323,11.387 v1@6.823,10.887
  Bottom Layer w0.254: v1(5.207,2.413) 5.842,2.413 6.604,3.175 v1(6.604,10.668) 7.82,11.884 7.82,17.072 v1(7.366,17.526) v1@7.366,17.272
NetC28_2: C28.2 R22.1 | length 1.8
  Top Layer w0.254: C28.2@19.812,30.226 R22.1@21.629,30.226
NetCB1_2: CB1.2 U3.29 | length 3.3
  Top Layer w0.254: U3.29 63.115,19.292 63.355,19.052 64.499,19.052 CB1.2
NetCB3_2: CB3.2 U3.13 U3.14 | length 4.8
  Top Layer w0.254: U3.13 U3.14 62.115,26.366 61.903,26.578 61.903,28.136 CB3.2@62.723,28.956
NetCON1_1: CON1.1 T1.1 | length 1.5
  Top Layer w0.394: T1.1 71.881,22.987 CON1.1
NetCX1_2: CX1.2 U2.91 Xtal1.3 | length 9.6
  Top Layer w0.254: U2.91 34.87,17.931 35.56,18.621 v1@35.56,19.558
  Bottom Layer w0.254: v1@35.677,19.533 36.449,20.305 37.223,20.305 38.114,21.196 39.534,21.196 40.424,20.306 Xtal1.3 Xtal1.3@40.424,20.032
  other v1: 35.509,19.577
NetCX2_2: CX2.2 U2.92 Xtal1.1 | length 6.4
  Top Layer w0.254: U2.92 35.592,17.431 v1(36.068,17.907)
  Bottom Layer w0.254: v1@36.068,17.78 v1@35.941,17.78 ; v1(36.068,17.907) v1@35.941,17.78 ; Xtal1.1 37.977,17.169 37.366,17.78 v1@35.941,17.78
NetCX3_2: CX3.2 U3.26 Xtal2.1 | length 6.9
  Top Layer w0.254: U3.26 61.615,19.1 60.53,18.015 Xtal2.1 61.481,16.624 62.977,15.128 CX3.2
NetCX4_2: CX4.2 U3.25 Xtal2.3 | length 7.8
  Top Layer w0.254: CX4.2@57.53,13.626 Xtal2.3 57.667,15.024 58.801,16.158 58.801,17.565 U3.25
NetD1_1: D1.1 R18.1 | length 2.8
  Top Layer w0.254: D1.1 R18.1@13.015,4.318
NetD1_2: D1.2 IC1.19 | length 6.1
  Top Layer w0.254: D1.2 8.001,4.318 8.001,9.328 IC1.19
NetD2_1: D2.1 R16.1 | length 2.5
  Top Layer w0.254: R16.1@19.253,5.334 D2.1
NetD2_2: D2.2 IC1.2 | length 5.1
  Top Layer w0.254: IC1.2 12.089,8.89 15.037,8.89 D2.2
NetD3_1: D3.1 R17.1 | length 3
  Top Layer w0.254: D3.1 R17.1
NetD3_2: D3.2 IC1.3 | length 2.9
  Top Layer w0.254: IC1.3 12.104,9.887 12.383,9.608 13.215,9.608 D3.2
NetD4_1: D4.1 R19.1 | length 7.2
  Top Layer w0.254: D4.1 11.506,5.461 16.444,5.461 R19.1
NetD4_2: D4.2 IC1.18 | length 3.9
  Top Layer w0.254: D4.2 6.909,9.665 7.108,9.864 IC1.18@7.919,9.864
NetIC1_10: IC1.10 R29.2 | length 8.5
  Top Layer w0.254: IC1.10 10.542,14.136 11.211,14.805 13.262,14.805 v1(13.335,14.732) ; v1(13.589,17.018) 13.931,16.676 R29.2 R29.2@15.582,16.637
  Bottom Layer w0.254: v1(13.335,14.732) 13.262,14.805 13.262,16.691 v1(13.589,17.018)
NetIC1_13: IC1.13 R23.1 | length 7.8
  Top Layer w0.254: R23.1 4.953,7.874 5.207,8.128 5.207,11.43 6.164,12.387 IC1.13 IC1.13@7.937,12.392
NetIC1_14: IC1.14 R24.1 | length 9.8
  Top Layer w0.254: R24.1@4.039,5.357 R24.1 5.438,5.357 5.715,5.633 5.715,10.96 6.642,11.887 IC1.14
NetJ1_1: J1.1 R20.1 | length 9.4
  Top Layer w0.254: J1.1 10.311,23.216 R20.1
NetR4_1: R4.1 U1.26 | length 8
  Top Layer w0.254: v1(15.494,23.368) 17.083,21.779 18.056,21.779 18.236,21.598 U1.26
  Bottom Layer w0.254: v1(15.494,23.368) 16.041,23.368 R4.1
NetR5_1: R5.1 U1.25 | length 9.8
  Top Layer w0.254: v1(14.478,24.892) 15.621,24.892 18.415,22.098 U1.25
  Bottom Layer w0.254: R5.1 13.921,25.449 v1(14.478,24.892)
NetR6_1: R6.1 U1.1 | length 7.4
  Top Layer w0.254: v1(17.145,18.923) 17.653,18.415 21.209,18.415 21.741,18.947 U1.1
  Bottom Layer w0.254: R6.1 16.637,17.653 17.145,18.161 v1(17.145,18.923)
NetR7_1: R7.1 U1.2 | length 6.3
  Top Layer w0.254: R7.1 17.743,17.743 17.921,17.921 21.449,17.921 22.241,18.713 U1.2
NetR8_1: R8.1 T2.1 U3.7 | length 11
  Top Layer w0.254: U3.7 66.274,23.729 67.056,24.511 67.056,29.376 R8.1 69.215,29.972 T2.1
NetR9_1: R9.1 U3.17 | length 8.1
  Top Layer w0.254: R9.1 57.746,25.439 58.956,24.229 U3.17
NetR10_2: R10.2 U1.11 | length 2.2
  Top Layer w0.254: U1.11 25.874,22.065 26.576,22.065 27.051,21.59 R10.2
NetR11_2: R11.2 U1.12 | length 3.3
  Top Layer w0.254: U1.12 27.424,22.598 27.979,23.153 R11.2
NetR12_2: R12.2 U1.9 | length 3.3
  Top Layer w0.254: U1.9 25.874,21.065 26.576,21.065 27.813,19.828 R12.2
NetR21_1: R21.1 U5.8 | length 1.8
  Top Layer w0.254: U5.8@11.535,20.615 R21.1@13.36,20.615
NRST: R13.1 U2.46 U3.8 | length 20.8
  Top Layer w0.254: U2.46@50.285,23.429 U2.46 50.292,23.422 54.156,23.422 55.753,25.019 55.118,25.019 54.295,25.842 R13.1 ; U3.8 65.885,24.229 66.167,24.511 v1(66.167,25.019)
  Bottom Layer w0.254: v1@55.953,24.946 57.293,24.946 57.312,24.965 58.004,24.965 58.023,24.946 v1@66.094,24.946
  other v1: 55.88,25.019
NSEL: R15.1 U2.49 U3.23 | length 30.7
  Top Layer w0.254: v1(43.434,20.574) 43.475,20.574 43.91,20.139 46.32,20.139 46.52,19.939 v1(48.006,19.939) ; v1(43.434,22.987) 44.863,24.416 47.988,24.416 48.458,24.885 U2.49@50.237,24.885 ; R15.1@53.376,20.193 v1(54.991,20.193) ; v1@56.769,18.422 59.576,21.229 U3.23
  Bottom Layer w0.254: v1(43.434,20.574) v1(43.434,22.987) ; v1(48.006,19.939) 48.26,20.193 v1(54.991,20.193) v1(56.769,18.415)
PIN9: P2.5 U2.9 | length 24.3
  Top Layer w0.254: v1(39.648,13.139) 39.702,13.139 39.783,13.057 U2.9 U2.9@39.735,10.883
  Bottom Layer w0.254: v1@39.727,13.057 v1@39.73,13.057 ; P2.5 51.581,12.554 40.233,12.554 v1@39.73,13.057 ; v1@39.73,13.057 v1(39.648,13.139) 39.702,13.139 39.783,13.057 v1@39.73,13.057
PIN10: P2.9 U2.10 | length 21.9
  Top Layer w0.254: v1(38.227,8.128) 38.316,8.128 39.278,9.09 40.03,9.09 40.283,9.344 U2.10
  Bottom Layer w0.254: v1(38.227,8.128) 38.227,6.096 39.243,5.08 52.451,5.08 P2.9
PIN11: P2.1 U2.11 | length 29.6
  Top Layer w0.254: v1(39.624,8.255) 39.837,8.255 40.783,9.202 U2.11 ; v1(51.181,8.382) 60.833,8.382 P2.1
  Bottom Layer w0.254: v1(39.624,8.255) 39.624,8.217 41.183,6.658 49.622,6.658 51.181,8.217 v1(51.181,8.382)
PIN12: P2.3 U2.12 | length 23.9
  Top Layer w0.254: v1(40.894,8.128) 40.894,8.382 41.253,8.741 41.253,10.901 U2.12 ; v1(49.276,7.493) 59.182,7.493 P2.3
  Bottom Layer w0.254: v1(40.894,8.128) 41.137,8.128 41.764,7.501 49.268,7.501 v1(49.276,7.493)
PIN15: R7.2 R11.1 U2.15 | length 43.6
  Top Layer w0.254: R7.2 20.408,16.129 v1(20.955,16.129) ; R11.1 30.353,24.13 v1(30.988,23.495) ; v1(29.718,16.51) 29.791,16.583 29.791,17.1 29.772,17.119 29.772,18.26 29.791,18.279 29.791,19.739 v1(29.718,19.812) ; v1(41.634,22.711) 41.634,16.291 42.783,15.142 U2.15
  Bottom Layer w0.254: v1(20.955,16.129) 22.263,16.129 22.59,16.456 29.664,16.456 v1(29.718,16.51) ; v1(29.718,19.812) 29.718,22.136 v1@30.988,23.406 ; v1(30.988,23.495) v1@30.988,23.406 ; v1@41.51,22.587 v1(41.634,22.711) 41.383,22.46 32.023,22.46 31.077,23.406 v1@30.988,23.406
PIN16: R6.2 R10.1 U2.16 | length 38.8
  Top Layer w0.254: v1(28.575,20.32) 28.575,20.613 R10.1 ; U2.16 43.307,10.955 v1(43.307,19.177)
  Bottom Layer w0.254: R6.2 18.034,19.418 19.177,20.561 28.334,20.561 v1(28.575,20.32) 28.575,19.774 29.661,18.688 35.541,18.688 35.595,18.742 36.414,18.742 36.468,18.688 42.818,18.688 v1(43.307,19.177)
PIN17: R4.2 U2.17 | length 42
  Top Layer w0.254: v1@40.792,23.69 40.792,23.876 v1(40.792,23.597) 40.767,23.607 40.767,14.478 v1(41.402,13.843) ; U2.17 43.783,13.303 v1@44.323,13.843
  Bottom Layer w0.254: R4.2 18.073,24.892 30.772,24.892 31.839,23.825 31.839,23.406 32.331,22.914 40.11,22.914 v1(40.792,23.597) ; v1(41.402,13.843) v1@44.323,13.843
  other v1: 44.145,13.843
PIN18: R5.2 U2.18 | length 49.2
  Top Layer w0.254: v1(22.86,28.829) 23.838,28.829 24.419,28.248 v1(32.512,28.248) ; v1(39.243,25.019) 39.853,24.409 39.853,14.707 39.878,14.732 v1(39.878,14.859) ; U2.18 44.283,12.8 44.98,13.497 v1@44.98,14.703
  Bottom Layer w0.254: R5.2 15.621,29.591 16.51,30.48 21.101,30.48 22.752,28.829 v1(22.86,28.829) ; v1(32.512,28.248) 34.236,28.248 37.665,24.819 38.662,24.819 38.862,25.019 v1(39.243,25.019) ; v1@39.624,14.732 v1(45.009,14.732) 45.031,14.732 v1@45.158,14.859
PIN19: R2.1 U1.28 U2.19 | length 42.4
  Top Layer w0.254: R2.1 19.05,20.498 ; v1(19.05,19.253) 19.05,20.498 ; U1.28 20.541,20.498 19.05,20.498 ; v1(34.493,8.636) 34.493,8.433 35.633,7.293 43.361,7.293 44.783,8.715 U2.19
  Bottom Layer w0.254: v1(19.05,19.253) 19.05,12.326 21.578,9.798 21.616,9.798 22.778,8.636 v1(34.493,8.636)
PIN20: R2.2 U1.27 U2.20 | length 50.9
  Top Layer w0.254: v1(14.986,22.098) 15.482,21.602 R2.2 16.256,20.498 16.305,20.547 16.305,21.133 16.497,21.325 17.868,21.325 18.094,21.098 U1.27 ; v1@35.052,6.985 35.198,6.839 43.796,6.839 45.283,8.326 U2.20 U2.20@45.285,10.929
  Bottom Layer w0.254: v1(14.986,22.098) 14.986,15.748 21.39,9.344 21.428,9.344 22.717,8.055 33.401,8.055 34.471,6.985 v1(34.671,6.985)
PIN21: R3.2 U1.24 U2.21 | length 52.7
  Top Layer w0.254: v1(17.145,27.559) 15.875,26.289 R3.2 15.838,25.437 18.644,22.631 20.608,22.631 U1.24 ; v1(37.084,23.749) 38.354,22.479 v1(38.354,13.716) ; U2.21 v1@45.783,13.716
  Bottom Layer w0.254: v1(17.145,27.559) 17.58,27.994 29.029,27.994 33.147,23.876 34.506,23.876 35.341,24.711 36.122,24.711 v1@36.957,23.876 ; v1(38.354,13.716) 38.612,13.974 39.994,13.974 40.96,13.008 45.114,13.008 v1(45.822,13.716) ; v1@38.481,13.678 v1@38.481,13.716
PIN22: R3.1 U1.23 U2.22 | length 48.3
  Top Layer w0.254: R3.1@17.665,26.416 R3.1 ; U1.23 20.608,23.131 19.906,23.131 18.681,24.356 18.681,25.146 R3.1 ; v1(20.701,26.289) R3.1 ; v1(35.687,23.876) 37.338,22.225 v1(37.338,15.113) ; U2.22 46.283,12.882 46.663,13.262 46.663,14.913 v1(46.736,14.986)
  Bottom Layer w0.254: v1(20.701,26.289) 25.616,26.289 ; 25.743,26.416 25.943,26.616 29.69,26.616 32.938,23.368 35.179,23.368 v1(35.687,23.876) ; v1(37.338,15.113) 37.919,15.694 46.028,15.694 v1(46.736,14.986)
PIN48: U2.48 U3.11 | length 17.6
  Top Layer w0.254: U2.48 53.547,24.431 v1(53.721,24.257) ; U3.11 v1(63.615,27.825)
  Bottom Layer w0.254: v1(53.721,24.257) 57.289,27.825 v1(63.615,27.825)
PIN50: U2.50 U3.22 | length 29.8
  Top Layer w0.254: v1(44.25,25.251) 44.631,24.87 46.46,24.87 47.021,25.431 U2.50 ; v1(44.704,18.542) 44.777,18.469 46.32,18.469 46.52,18.669 v1(47.879,18.669) ; v1(54.737,18.923) 55.064,19.25 56.849,19.25 59.328,21.729 U3.22
  Bottom Layer w0.254: v1@44.577,24.892 44.577,18.669 v1(44.704,18.542) ; v1(47.879,18.669) 48.133,18.923 v1(54.737,18.923)
PIN51: U2.51 U3.19 | length 19.3
  Top Layer w0.254: U2.51@47.792,27.94 v1(49.403,27.94) ; v1(56.769,22.733) 57.277,23.241 U3.19@60.253,23.241
  Bottom Layer w0.254: v1(49.403,27.94) 48.006,26.543 48.006,23.622 48.187,23.441 48.225,23.441 48.31,23.356 56.146,23.356 v1(56.769,22.733)
PIN52: U2.52 U3.20 | length 22.1
  Top Layer w0.254: v1(45.466,21.209) v1(48.006,21.209) ; v1@45.466,25.654 46.594,25.654 47.283,26.344 ; v1@57.81,22.098 58.441,22.729 U3.20
  Bottom Layer w0.254: v1(45.466,21.209) v1@45.466,25.654 ; v1(48.006,21.209) 48.121,21.094 55.295,21.094 55.61,21.409 57.121,21.409 v1@57.81,22.098
  other v1: 57.734,21.971 45.466,25.705
PIN89: P1.1 U2.89 | length 58.1
  Top Layer w0.254: v1(30.988,19.685) v1@30.988,19.639 ; v1(36.449,8.128) 36.449,8.178 31.456,13.171 31.456,16.077 30.226,17.307 30.226,18.072 30.988,18.834 v1@30.988,19.639 ; v1@30.988,19.639 31.648,18.979 U2.89@33.235,18.979 ; U2.89@33.235,18.979 U2.89 U2.89@33.235,18.979
  Bottom Layer w0.254: v1(36.449,8.128) 36.449,6.858 38.862,4.445 73.152,4.445 P1.1
RESET: C14.1 P1.5 P2.6 P3.1 R1.1 U2.90 | length 62.1
  Top Layer w0.254: v1(31.061,17.653) 30.988,17.653 30.988,17.907 31.512,18.431 U2.90 ; R1.1 38.721,2.337 P3.1 40.665,3.927 C14.1 ; v1(66.421,2.159) 66.421,2.794 P1.5
  Bottom Layer w0.254: v1(31.061,17.653) 31.061,13.249 35.614,8.696 35.614,6.334 39.611,2.337 P3.1 42.821,2.337 44.196,0.962 55.953,0.962 P2.6 59.37,2.225 66.355,2.225 v1(66.421,2.159)
RF-GND: C26.1 CB1.1 CB2.1 CON1.3 CON1.4 CON1.5 CON1.6 CX3.1 CX4.1 L1.1 T1.2 T1.5 T1.6 U3.1 U3.2 U3.3 U3.6 U3.27 U3.30 U3.31 U3.32 U3.33 | length 20.4
  Top Layer w0.254: CX4.1 v1(60.706,13.487) ; CB2.1 CB2.1@63.919,18.161 ; U3.33@63.741,21.603 U3.33@64.115,21.229 ; v1@66.69,17.033 CB1.1
  Top Layer w0.3: U3.27 62.115,21.729 v1(62.865,22.479) ; U3.1 U3.2 ; U3.6 63.615,23.229 v1(62.865,22.479) ; v2@65.472,19.879 U3.32 U3.31 ; v1(62.865,22.479) U3.33@63.615,21.729 ; U3.33@63.615,21.729 U3.30 U3.31 ; U3.33@63.615,21.729 U3.3 U3.2 ; U3.31 64.115,21.229 U3.2
  Top Layer w0.4: T1.5 T1.6
  other v1: 64.643,13.335 66.675,13.335 66.548,15.113 64.643,16.764 66.675,17.018 61.976,21.59 63.729,21.59 61.976,23.368 63.729,23.368
  other v2: 65.659,19.812 66.802,19.812 66.802,20.828 74.295,21.59 74.337,24.511 68.072,24.638 68.072,25.908 72.771,27.178 68.072,27.305 72.771,28.575 72.771,30.099
  other v3: 70.612,19.558 71.501,19.558 70.612,20.447 71.501,20.447 73.152,20.701 75.438,20.701 72.136,21.463 70.739,22.479 69.85,25.019 71.628,25.019
  other v4: 74.168,22.987 70.739,24.638 73.152,25.527
  other v6: 70.739,25.908
RF-VCC: C26.2 CB2.2 L3.2 U3.28 | length 7.6
  Top Layer w0.254: CB2.2 62.418,17.338 v1(62.865,16.891) ; CB2.2@62.515,18.257 62.611,18.354 62.611,19.875 U3.28 ; L3.2 73.367,18.757 v1(73.787,19.177) ; L3.2@73.377,17.536 C26.2
TS: IC1.12 R26.2 R28.2 | length 6.5
  Top Layer w0.254: R26.2 R28.2 4.013,12.973 7.856,12.973 IC1.12
U-GND: L6.1 P4.ID P4.shield P4.UGND U4.1 | length 23.7
  Top Layer w0.254: P4.shield@22.888,2.836 v1@25.104,2.836 ; P4.shield@22.888,7.061 22.86,7.089 P4.shield@22.916,7.089 ; P4.shield@23.01,7.089 P4.shield@22.916,7.089 ; 24.339,7.089 P4.shield@22.916,7.089 ; v1@25.092,13.916 25.092,11.63 24.362,10.9 24.362,6.715 25.146,5.931 v1(25.146,5.842) ; v1(28.448,5.207) 28.613,5.372 P4.ID P4.ID@28.575,7.023 ; P4.UGND@29.413,6.782 P4.UGND ; P4.UGND@29.464,7.112 P4.UGND ; v1(29.591,5.207) 29.413,5.385 P4.UGND ; v1@30.649,2.836 P4.shield@32.738,2.836 ; v1(30.734,6.985) 30.782,7.033 32.766,7.033 P4.shield@32.738,7.061 ; v1@34.671,1.524 35.128,1.981 L6.1
  Bottom Layer w0.254: v1@25.146,13.97 25.146,13.94 U4.1
  other v1: 34.544,1.651 25.146,2.794 30.607,2.794 25.095,13.919
V-AC: C21.1 IC1.4 IC1.8 IC1.9 J1.2 J1.3 R25.2 | length 30.5
  Top Layer w0.254: IC1.8 12.387,12.387 v1(12.7,12.7) ; IC1.9 12.513,12.887 13.522,12.887 13.843,13.208 15.001,13.208 C21.1 17.819,13.97 R25.2 R25.2@17.768,15.088 ; IC1.4@11.615,10.41 IC1.4 12.673,10.387 v1(12.729,10.443)
  Bottom Layer w0.254: J1.3 10.465,26.01 J1.2 12.446,24.028 12.446,12.954 v1(12.7,12.7) ; v1(12.729,10.443) v1@12.729,12.671
VBUS: C19.1 IC1.20 P4.VBUS U1.8 U4.4 | length 45.9
  Top Layer w0.254: IC1.20 8.992,2.565 10.487,1.07 19.739,1.07 21.082,2.413 v1(21.082,7.112) ; U1.8 26.743,19.696 26.743,15.494 ; P4.VBUS v1(25.197,7.061) 25.197,8.433 v1(26.67,9.906) 26.743,9.979 26.743,15.494 ; C19.1 26.743,15.494
  Bottom Layer w0.254: v1(21.082,7.112) v1@25.146,7.112 ; U4.4 v1@26.67,10.016
VCC: C1.1 C2.1 C3.1 C4.1 C7.1 C8.1 C9.1 C10.1 C11.1 C13.1 C18.1 C23.1 C29.2 C30.2 CB4.1 F1.1 L3.1 L4.1 P1.2 P2.4 R1.2 R12.1 R13.2 R14.2 R15.2 R16.2 R17.2 R18.2 R19.2 R21.2 R22.2 U1.6 U1.7 U2.14 U2.24 U2.34 U2.44 U2.54 U2.64 U2.74 U2.83 U3.15 U5.5 U5.6 | length 123.5
  Top Layer w0.254: U5.5@11.535,16.805 10.119,16.805 v1(9.398,17.526) 9.947,18.075 U5.6@11.535,18.075 ; v1(11.557,21.844) 12.051,22.338 R21.2@13.462,22.338 ; R18.2 14.163,2.352 v1(14.986,3.175) 16.444,3.175 16.698,3.429 19.177,3.429 R16.2 17.78,4.831 17.78,8.763 18.034,9.017 20.574,9.017 v1(21.082,8.509) 22.159,9.586 R17.2 ; v1@22.159,17.206 22.159,12.954 R17.2 ; R17.2@22.225,10.414 R17.2 ; R22.2@23.329,30.607 R22.2@23.622,30.607 ; R22.2 25.639,30.226 ; U1.6 24.241,17.826 C18.1@24.741,17.326 ; U1.7 C18.1@24.741,17.326 ; v1(25.781,17.78) 25.303,17.302 C18.1 C18.1@24.741,17.326 ; C23.1 28.116,30.368 F1.1 27.686,29.718 v1(27.178,29.21) ; 28.323,17.35 28.937,17.964 v1(28.937,17.983) ; v1(30.988,22.225) 31.282,21.931 U2.83 ; U2.74 36.283,26.344 36.973,25.654 v1(38.1,25.654) ; v1(36.957,3.429) 37.172,3.644 R1.2 ; v1@40.818,25.705 41.283,26.17 U2.64 ; 42.283,9.344 42.523,9.104 43.195,9.104 v5(43.586,8.712) ; v1(45.847,30.226) 45.847,30.146 46.235,29.758 U2.54@46.235,27.979 ; U2.24 47.283,9.232 v1(47.879,8.636) ; v1(48.157,17.431) U2.34 ; U2.44 52.915,22.431 R15.2 v1(54.925,22.032) ; C30.2 55.179,12.639 57.934,12.639 L4.1 60.833,10.922 v1(61.214,11.303) ; v1@55.179,13.904 v1(55.245,13.97) R14.2 ; v1(55.626,28.956) 56.195,28.387 R13.2 ; P2.4 60.833,1.585 C8.1 ; v1(61.087,28.956) 60.975,28.844 CB4.1 60.975,26.401 61.615,25.761 U3.15 ; v1(68.707,19.685) 69.596,18.796 71.12,18.796 71.667,18.249 L3.1 C29.2@68.971,17.526 ; C7.1 74.549,2.855 P1.2
  Bottom Layer w0.254: v1(22.225,17.272) 25.273,17.272 v1(25.781,17.78) v1@25.973,17.588 ; v1(30.988,22.225) 31.75,21.463 C11.1 ; C3.1@36.068,27.432 C3.1 36.195,27.153 37.694,25.654 v1(38.1,25.654) ; v1@40.869,25.654 40.64,25.883 40.64,26.782 C10.1 ; C4.1 43.586,10.008 v5(43.586,8.712) ; v1(45.847,30.226) 46.228,29.845 46.228,28.478 C2.1 ; C9.1 47.667,10.88 47.667,8.932 47.879,8.72 v1(47.879,8.636) ; v1(48.157,17.431) C1.1@49.879,17.431 ; C13.1 50.076,22.225 50.753,21.548 54.441,21.548 v1(54.925,22.032)
  other v1: 40.869,25.696
pads on no net: A1.2 J1.NC P1.3 P1.4 P2.7 P2.8 U1.10 U1.13 U1.14 U1.15 U1.16 U1.17 U1.18 U1.19 U1.20 U1.21 U1.22 U2.1 U2.2 U2.5 U2.6 U2.7 U2.8 U2.25 U2.26 U2.27 U2.28 U2.29 U2.30 U2.31 U2.32 U2.35 U2.36 U2.37 U2.38 U2.39 U2.40 U2.41 U2.42 U2.45 U2.55 U2.56 U2.57 U2.58 U2.59 U2.60 U2.61 U2.62 U2.65 U2.66 U2.67 U2.68 U2.69 U2.70 U2.71 U2.72 U2.75 U2.76 U2.77 U2.78 U2.79 U2.80 U2.81 U2.82 U2.85 U2.86 U2.87 U2.88 U2.95 U2.96 U2.97 U2.98 U2.99 U2.100 U5.7 Xtal1.2 Xtal1.4 Xtal2.2 Xtal2.4

## Polygon pours and split planes (outlines as drawn)
RF-GND on Top Layer "RFGND" (solid, remove dead copper, pour order 1000): 56.896,12.319 56.896,17.78 58.928,19.812 65.405,19.812 65.405,24.003 65.532,24.13 67.056,24.13 67.437,24.511 67.437,30.988 74.295,30.988 74.295,26.035 74.676,25.019 76.835,25.019 76.708,24.892 76.708,12.319
GND on Internal Plane 1 (split plane): 67.253,24.438 66.948,24.132 65.459,24.132 65.153,24.438 65.153,24.892 65.144,24.942 65.116,24.984 63.973,26.127 63.931,26.155 63.881,26.164 60.706,26.164 60.656,26.155 60.614,26.127 60.487,26 60.459,25.958 60.45,25.908 60.45,24.513 59.182,24.513 59.132,24.504 59.09,24.476 59.062,24.434 59.053,24.384 59.053,21.973 56.896,21.973 56.846,21.964 56.804,21.936 56.776,21.894 56.767,21.844 56.767,19.463 56.767,14.7 56.767,12.319 56.776,12.269 56.804,12.227 56.846,12.199 56.896,12.19 67.818,12.19 67.868,12.199 67.91,12.227 67.938,12.269 67.947,12.319 67.947,18.413 76.706,18.413 76.706,1.018 35.562,1.018 35.562,2.667 35.553,2.717 35.525,2.759 35.483,2.787 35.433,2.796 34.419,2.796 34.419,9.144 34.41,9.194 34.382,9.236 34.34,9.264 34.29,9.273 21.463,9.273 21.413,9.264 21.371,9.236 21.343,9.194 21.334,9.144 21.334,1.018 1.018,1.018 1.018,30.986 11.682,30.986 11.682,29.337 11.691,29.287 11.719,29.245 11.761,29.217 11.811,29.208 16.256,29.208 16.306,29.217 16.348,29.245 16.376,29.287 16.385,29.337 16.385,30.986 43.305,30.986 43.305,24.894 32.893,24.894 32.843,24.885 32.801,24.857 32.773,24.815 32.764,24.765 32.764,12.446 32.773,12.396 32.801,12.354 32.843,12.326 32.893,12.317 48.768,12.317 48.818,12.326 48.86,12.354 48.888,12.396 48.897,12.446 48.897,16.637 48.888,16.687 48.86,16.729 48.818,16.757 48.768,16.766 46.611,16.766 46.611,30.986 67.253,30.986
RF-GND on Internal Plane 1 (split plane): 74.295,25.019 76.706,25.019 76.706,18.671 67.818,18.671 67.768,18.662 67.726,18.634 67.698,18.592 67.689,18.542 67.689,12.448 57.025,12.448 57.025,14.7 57.025,19.463 57.025,21.715 59.182,21.715 59.232,21.724 59.274,21.752 59.302,21.794 59.311,21.844 59.311,24.255 60.579,24.255 60.629,24.264 60.671,24.292 60.699,24.334 60.708,24.384 60.708,25.854 60.76,25.906 63.827,25.906 64.895,24.838 64.895,24.384 64.904,24.334 64.932,24.292 65.313,23.911 65.355,23.883 65.405,23.874 67.001,23.874 67.051,23.883 67.093,23.911 67.474,24.292 67.502,24.334 67.512,24.384 67.512,30.986 74.295,30.986
A-GND on Internal Plane 1 (split plane): 46.353,16.637 46.362,16.587 46.39,16.545 46.432,16.517 46.482,16.508 48.639,16.508 48.639,12.575 33.022,12.575 33.022,24.636 43.434,24.636 43.484,24.645 43.526,24.673 43.554,24.715 43.563,24.765 43.563,30.986 46.353,30.986
U-GND on Internal Plane 1 (split plane): 34.161,3.683 34.161,2.667 34.17,2.617 34.198,2.575 34.24,2.547 34.29,2.538 35.304,2.538 35.304,1.018 21.592,1.018 21.592,9.015 34.161,9.015
DC-GND on Internal Plane 1 (split plane): 16.127,29.466 11.94,29.466 11.94,30.986 16.127,30.986
VCC on Internal Plane 2 (split plane): 74.295,25.019 76.706,25.019 76.706,20.195 72.644,20.195 72.594,20.186 72.552,20.158 72.524,20.116 72.515,20.066 72.515,18.798 61.595,18.798 61.545,18.789 61.503,18.761 61.475,18.719 61.466,18.669 61.466,15.875 61.475,15.825 61.503,15.783 61.545,15.755 61.595,15.746 76.706,15.746 76.706,1.018 1.018,1.018 1.018,30.986 41.908,30.986 41.908,22.862 34.798,22.862 34.748,22.853 34.706,22.825 34.678,22.783 34.669,22.733 34.669,12.446 34.678,12.396 34.706,12.354 34.748,12.326 34.798,12.317 48.768,12.317 48.818,12.326 48.86,12.354 48.888,12.396 48.897,12.446 48.897,16.637 48.888,16.687 48.86,16.729 48.818,16.757 48.768,16.766 44.96,16.766 44.96,30.986 74.295,30.986
A-VCC on Internal Plane 2 (split plane): 44.702,16.637 44.711,16.587 44.739,16.545 44.781,16.517 44.831,16.508 48.385,16.508 48.385,12.575 34.927,12.575 34.927,22.604 42.037,22.604 42.087,22.613 42.129,22.641 42.157,22.683 42.166,22.733 42.166,30.986 44.702,30.986
RF-VCC on Internal Plane 2 (split plane): 76.706,16.004 61.724,16.004 61.724,18.54 72.644,18.54 72.694,18.549 72.736,18.577 72.764,18.619 72.773,18.669 72.773,19.937 76.706,19.937

## Other copper
Internal Plane 1 (plane layer: these items are gaps in the copper):
  rectangle: 74.295,25.019 77.597,31.496
  lines w0.254: 11.811,31.496 11.811,29.337 16.256,29.337 16.256,31.496 ; 21.463,0.254 21.463,9.144 25.146,9.144 28.321,9.144 31.623,9.144 34.29,9.144 ; 34.29,3.683 34.29,9.144 ; 35.433,0.254 35.433,2.667 34.29,2.667 34.29,9.144 ; 43.434,31.877 43.434,24.765 40.799,24.765 39.624,24.765 32.893,24.765 32.893,12.446 48.768,12.446 48.768,16.637 46.482,16.637 46.482,31.496 ; 67.382,31.496 67.382,24.384 67.001,24.003 65.405,24.003 65.024,24.384 65.024,24.892 63.881,26.035 60.706,26.035 60.579,25.908 60.579,24.384 59.182,24.384 59.182,21.844 56.896,21.844 56.896,19.463 56.896,14.7 56.896,12.319 67.818,12.319 67.818,18.542 77.47,18.542
Internal Plane 2 (plane layer: these items are gaps in the copper):
  rectangle: 74.295,25.019 77.597,31.496
  lines w0.254: 41.402,31.496 42.037,31.496 ; 42.037,31.877 42.037,22.733 34.798,22.733 34.798,12.446 44.45,12.446 48.768,12.446 ; 44.831,12.446 48.768,12.446 ; 44.831,31.623 44.831,16.637 48.768,16.637 ; 48.006,16.637 48.768,16.637 ; 48.514,12.446 48.514,16.637 ; 77.216,20.066 72.644,20.066 72.644,18.669 61.595,18.669 61.595,15.875 77.343,15.875 ; 48.768,12.446 48.768,16.637 ; 48.768,12.446 48.768,16.637

## Silkscreen, mask and mechanical layers (free items; w line width, h text height)
Top Overlay:
  text "epf" at 5.334,25.908 h1.3
  text "Marina" at 62.611,10.541 h1.5
  text "ULPGC" at 71.374,9.271 h1
  text "Martin" at 62.611,8.255 h1.5
Mechanical 1:
  lines w0.254: 0.508,0.635 0.508,31.496 77.089,31.496 77.216,31.369 77.216,0.508 0.635,0.508 0.508,0.635

## Text inside footprints (layer, text, board x,y; h text height)
CON1: Top Overlay "IN" at 73.293,22.83 h0.2; Top Overlay "OUT" at 74.768,22.836 h0.2
P1: Top Overlay "1" at 76.581,6.35 h1.27 r180; Top Overlay "2" at 77.089,3.81 h1.27 r180; Top Overlay "5" at 67.945,6.35 h1.27 r180; Top Overlay "6" at 67.945,3.81 h1.27 r180
P2: Top Overlay "9" at 51.689,6.35 h1.27 r180; Top Overlay "1" at 65.405,6.35 h1.27 r180; Top Overlay "2" at 65.913,3.81 h1.27 r180